# Altium PCB nrf52840_bma250e.PcbDoc
Units mil, origin at the board's own origin, x right, y up, seen from the top; angles counter-clockwise.
Board outline 4448.82 x 4448.82 mil, 2 copper layers (Top Layer, Bottom Layer), stack 12.8 mil thick; 33 components, 63 nets, 168 pads, 148 vias.
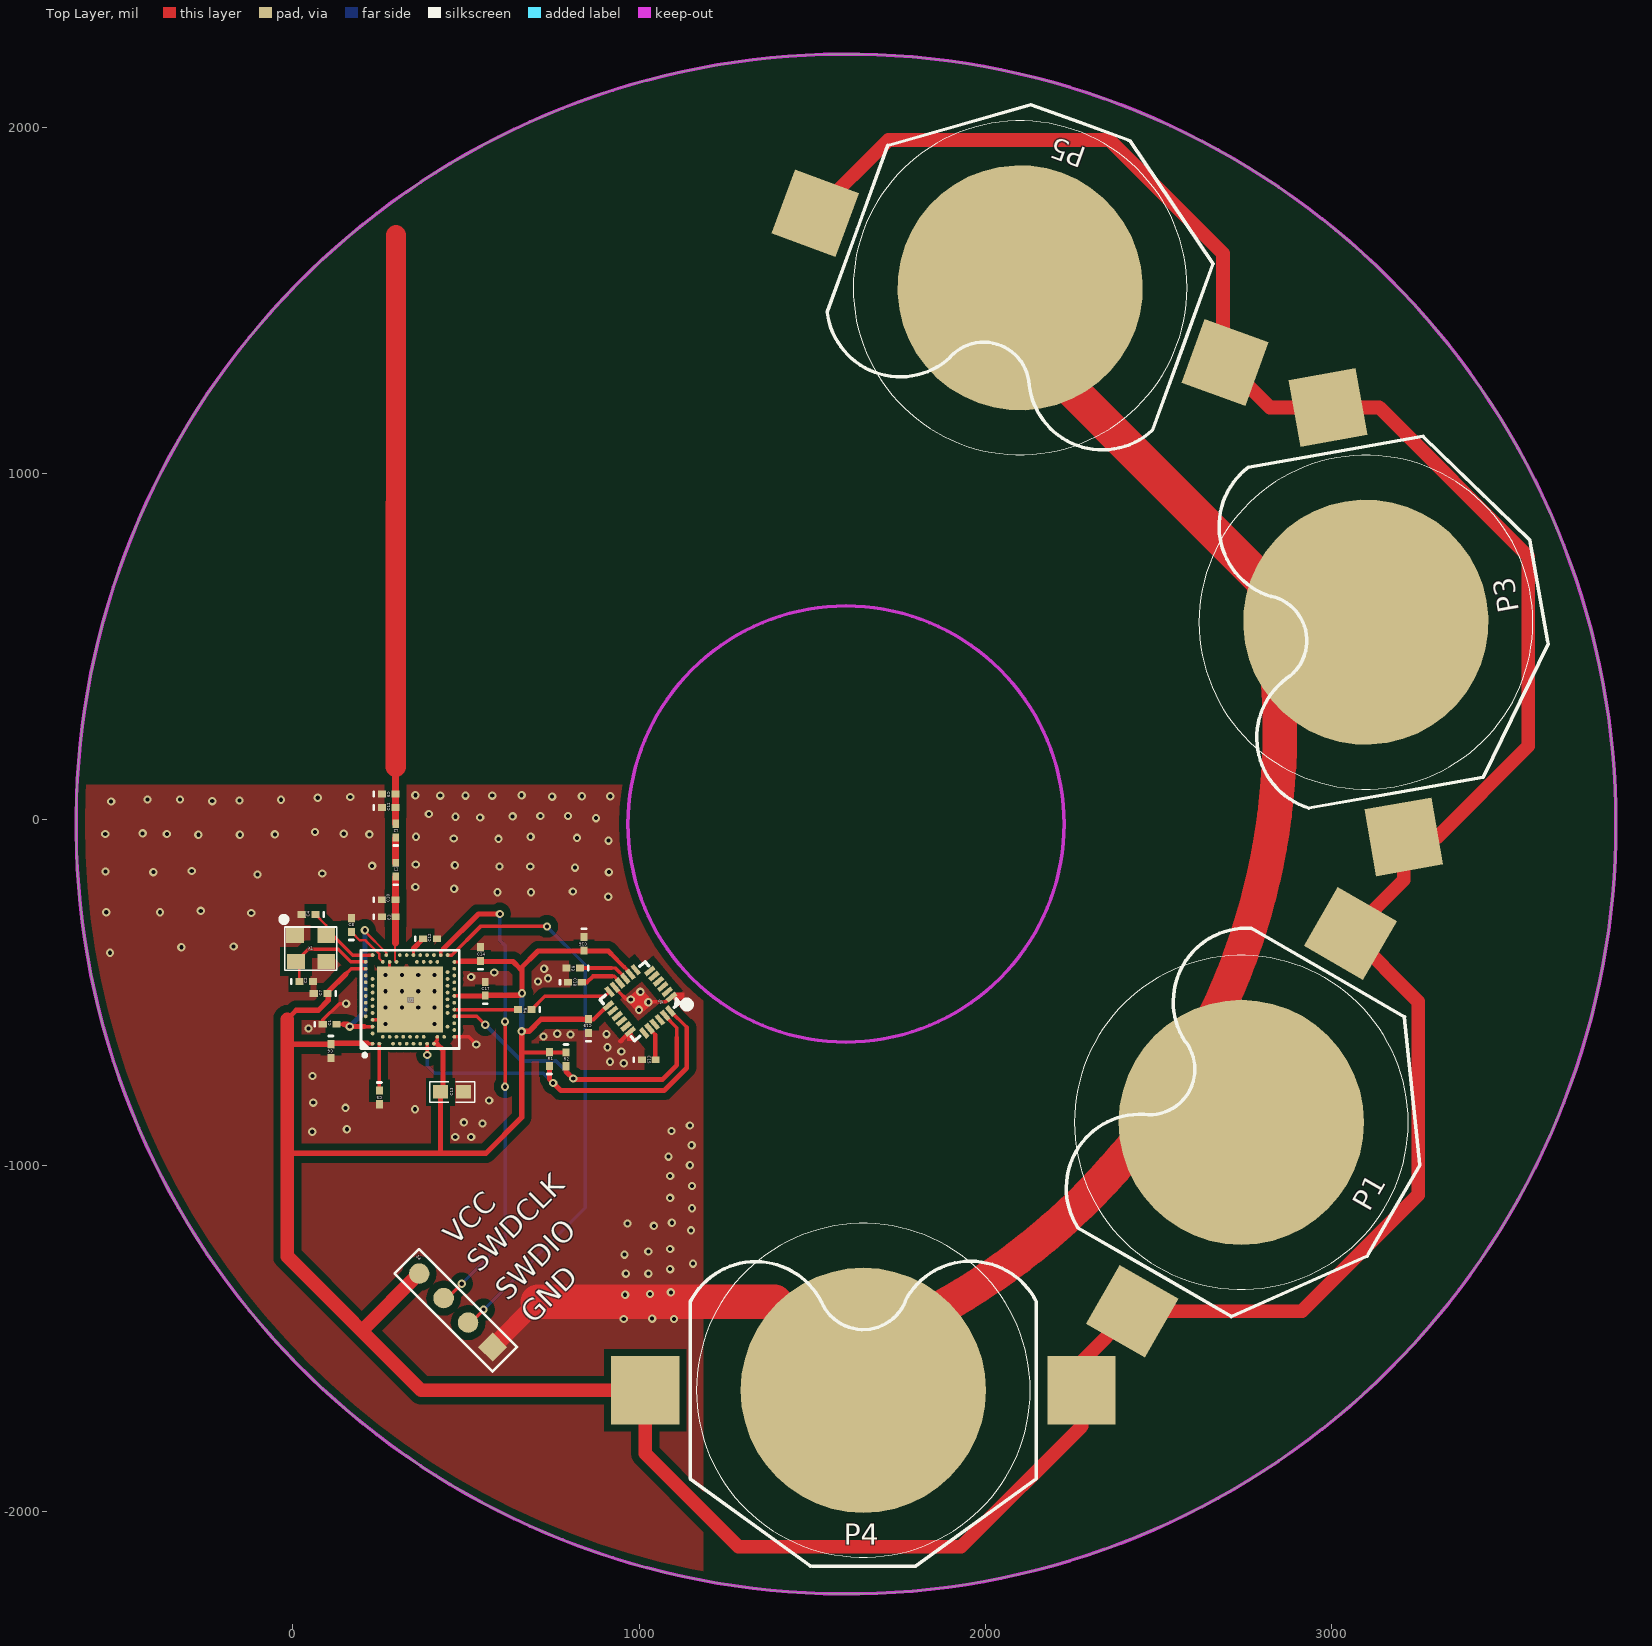
[diagram p0: Top Layer view]
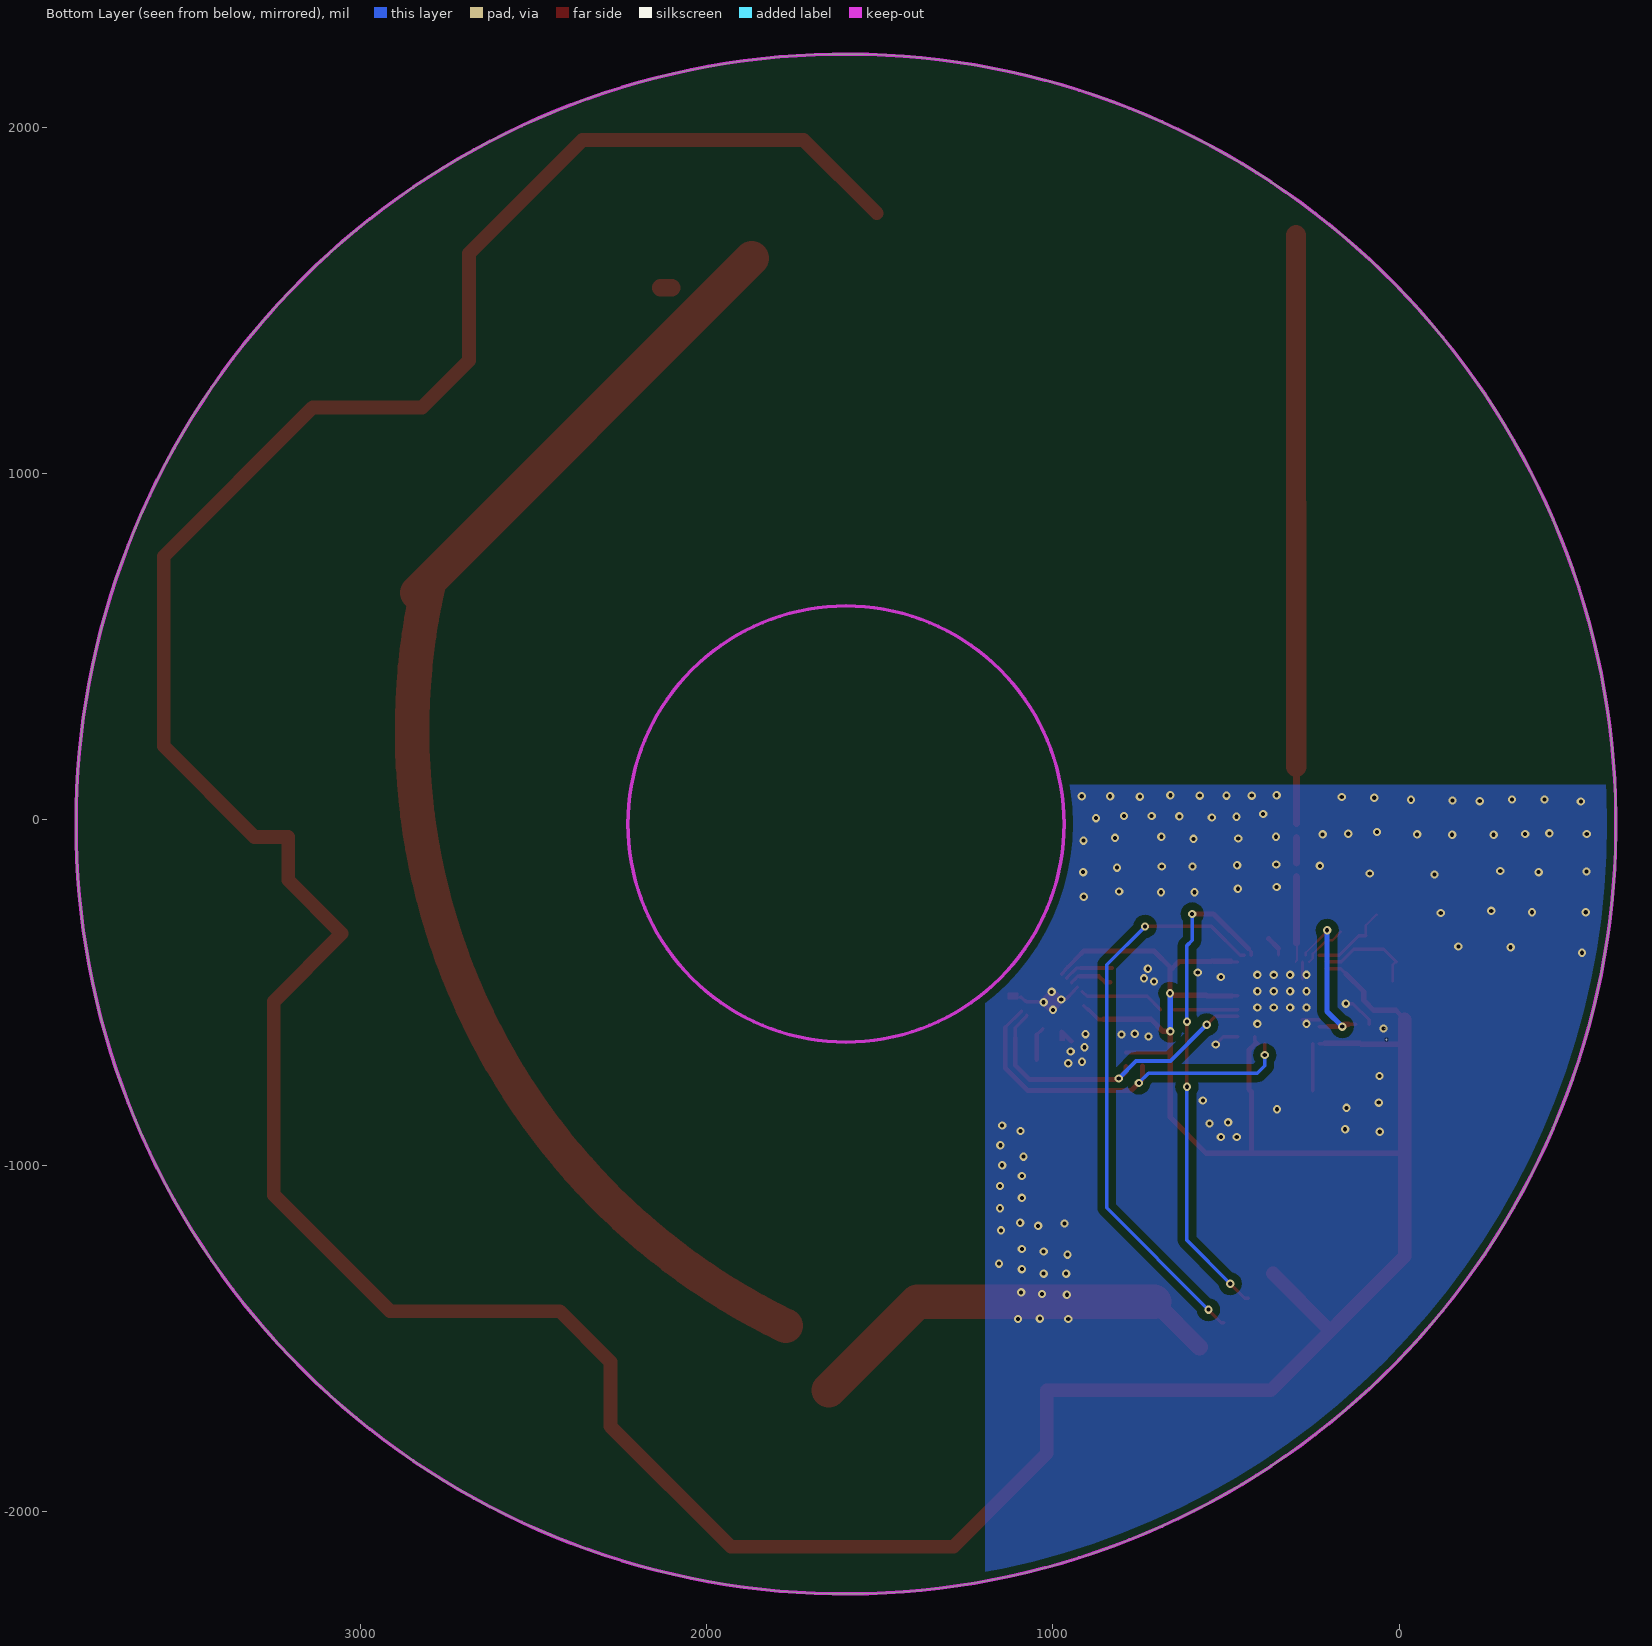
[diagram p1: Bottom Layer view, seen from below]

## Layer stack, top to bottom
Top Layer: signal copper 1.4
Dielectric: core 10, FR-4, Dk 4.2
Bottom Layer: signal copper 1.4

## Board outline
-626.41,-13 ccw(c1598,-13) 1598,-2237.41 ccw(c1598,-13) 3822.41,-13 ccw(c1598,-13) 1598,2211.41 ccw(c1598,-13)

## Design rules (kind name [scope] priority, off if disabled: settings)
Clearance [All] p1: gap=5
ComponentClearance [All] p1 off: gap=10 collisioncheckmode=3 verticalgap=10 showdistances=FALSE
Height [All] p1 off: minheight=0 maxheight=1000 prefheight=500
MinimumSolderMaskSliver [All] p1 off: minsoldermaskwidth=10
NetAntennae [All] p1 off: netantennaetolerance=0
PlaneConnect [All] p1: planeconnectstyle=Direct reliefexpansion=20 reliefentries=4 reliefconductorwidth=10 reliefairgap=10
PolygonConnect [All] p1: connectstyle=Direct reliefconductorwidth=10 reliefentries=4 polygonreliefangle="90 Angle"
RoutingVias [All] p1: holewidth=28 width=50 viastyle="Through Hole" minholewidth=28 minwidth=50 maxholewidth=28 maxwidth=50
SilkToSilkClearance [All] p1 off: silktosilkclearance=10
SilkscreenOverComponentPads SilkToSolderMaskClearance [IsPad] p1 off: minsilkscreentomaskgap=10
SolderMaskExpansion [All] p1: expansion=4
Width [All] p1: maxlimit=100 minlimit=1 preferedwidth=10 minimp=50.000000 maximp=50.000000 favimp=50.000000
21 further rules are at their usual default settings.

## Components (designator, comment, footprint, x,y, rotation, side; value= is the part's Value field where it differs from the comment)
C1 "1.0μF" 0402-A 106.31,-591.39 r0 top
C2 "12pF" 0402-A 38.62,-467.62 r0 top
C3 "NC" 0402-A 277,-281 r0 top
C4 "12pF" 0402-A 45.62,-274.62 r180 top
C5 "100nF" 0402-A 250,-803 r270 top
C6 "1.0μF" 0402-A 110,-669 r270 top
C7 "100nF" 0402-A 80.31,-502.39 r180 top
C8 "100pF" 0402-A 169,-305 r90 top
C9 "NC" 0402-A 277,74 r0 top
C10 "NC" 0402-A 277,-232 r0 top
C11 "NC" 0402-A 277,35 r0 top
C12 "820pF" 0402-A 396.62,-344.62 r0 top
C13 "4.7μF" 0603-1 460,-787 r0 top
C14 "100nF" 0402-a 542,-389 r90 top
C15 "2.2nf" 0402-A 1028,-694 r0 top
C16 "0.1uF" 0402-A 841,-359 r270 top
C17 "100nF" 0402-a 556,-489 r90 top
C18 "0.1uF" 0402-A 815,-470 r0 top
C19 "0.1uF" 0402-A 854,-597 r90 top
L1 "NC" 0402-A 297,-145 r90 top
L2 "NC" 0402-A 297,-32 r90 top
P1 "Header 2" bat 2740,-875 r240 top
P2 "Header 4" HDR1X4 577,-1524 r135 top
P3 "Header 2" bat 3100,570 r280 top
P4 "Header 2" bat 1648,-1649 r180 top
P5 "Header 2" bat 2101,1536 r340 top
R1 "4.7K" 0402-A 741,-692 r90 top
R2 "4.7K" 0402-A 789,-693 r270 top
R3 "4.7K" 0402-A 810,-429 r180 top
R4 "0R" 0402-A 670,-549 r180 top
U1 "nRF52840-QIAA" AQFN50P700X700X85_HS-74N 338.62,-519.62 r90 top
U2 "mpu6050" mpu6050 1094,-513 r220 top
X1 "32MHz" SMD3225 96.62,-335.62 r180 top

## Footprints (in the part's own frame and the unit in brackets; to place one, negate y for a bottom-side part, rotate by r counter-clockwise, add the part's x,y. Pads: shape width x height; smd on the part's side, far side on the other; paste and mask are expansions set on the pad)
0402-A [mm] "Chip Inductor; Body 1 x 0.5 mm (LxW typ"
  rect 0.6x0.5 smd: 1(-0.5,0) 2(0.5,0)
  silkscreen extent -1.1,-0.15 -1.1,0.15
0402-a [mm] "Chip Inductor; Body 1 x 0.5 mm (LxW typ)"
  rect 0.6x0.5 smd: 1(-0.5,0) 2(0.5,0)
  silkscreen extent -1.1,-0.15 -1.1,0.15
0603-1 [mm]
  rect 1.1x1 smd: 1(-0.85,0) 2(0.85,0)
  silkscreen extent -1.65,-0.76 1.65,0.76, body extent -1.14,-0.38 1.14,0.38, height 1
AQFN50P700X700X85_HS-74N [mm]
  rect 4.85x4.85 smd mask+0.05: 74(0,0)
  round 0.275 smd paste+0.012 mask+0.05: A8(-1.25,3.25) A10(-0.75,3.25) A12(-0.25,3.25) A14(0.25,3.25) A16(0.75,3.25) A18(1.25,3.25) A20(1.75,3.25) A22(2.25,3.25) A23(2.75,3.25) AA24(3.25,-2.25) AB2(-2.75,-2.5) AC5(-2,-2.75) AC9(-1,-2.75) AC11(-0.5,-2.75) AC13(0,-2.75) AC15(0.5,-2.75) AC17(1,-2.75) AC19(1.5,-2.75) AC21(2,-2.75) AC24(3.25,-2.75) AD2(-2.75,-3.25) AD4(-2.25,-3.25) AD6(-1.75,-3.25) AD8(-1.25,-3.25) AD10(-0.75,-3.25) AD12(-0.25,-3.25) AD14(0.25,-3.25) AD16(0.75,-3.25) AD18(1.25,-3.25) AD20(1.75,-3.25) AD22(2.25,-3.25) AD23(2.75,-3.25) B1(-3.25,2.75) B3(-2.5,2.75) B5(-2,2.75) B7(-1.5,2.75) B9(-1,2.75) B11(-0.5,2.75) B13(0,2.75) B15(0.5,2.75) B17(1,2.75) B19(1.5,2.75) B24(3.25,2.75) C1(-3.25,2.25) D2(-2.75,2) D23(2.75,2) E24(3.25,1.75) F2(-2.75,1.5) F23(2.75,1.5) G1(-3.25,1.25) H2(-2.75,1) H23(2.75,1) J1(-3.25,0.75) J24(3.25,0.75) K2(-2.75,0.5) L1(-3.25,0.25) L24(3.25,0.25) M2(-2.75,0) N1(-3.25,-0.25) N24(3.25,-0.25) P2(-2.75,-0.5) P23(2.75,-0.5) R1(-3.25,-0.75) R24(3.25,-0.75) T2(-2.75,-1) T23(2.75,-1) U1(-3.25,-1.25) U24(3.25,-1.25) V23(2.75,-1.5) W1(-3.25,-1.75) W24(3.25,-1.75) Y2(-2.75,-2) Y23(2.75,-2)
  silkscreen extent -4.21,-3.6 3.6,3.6, body extent -3.55,-3.55 3.55,3.55, height 0.85
bat [mm]
  round 18 smd: 1(0,0)
  rect 5x5 smd: 2(-16,0) 2(16,0)
  silkscreen extent -12.7,-12.25 12.7,12.9
HDR1X4 [mm] "Connector; Header; 4 Position"
  rect 1.5x1.5 smd: 1(0,0)
  round 1.5 smd: 2(2.54,0) 3(5.08,0) 4(7.62,0)
  silkscreen extent -1.27,-1.27 8.89,1.27
mpu6050 [mm]
  rect 0.85x0.35 smd: 1(0,0) 2(0,-0.5) 3(0,-1) 4(0,-1.5) 5(0,-2) 6(0,-2.5) 13(3.95,-2.5) 14(3.95,-2) 15(3.95,-1.5) 16(3.95,-1) 17(3.95,-0.5) 18(3.95,0)
  rect 0.35x0.85 smd: 7(0.725,-3.225) 8(1.225,-3.225) 9(1.725,-3.225) 10(2.225,-3.225) 11(2.725,-3.225) 12(3.225,-3.225) 19(3.225,0.725) 20(2.725,0.725) 21(2.225,0.725) 22(1.725,0.725) 23(1.225,0.725) 24(0.725,0.725)
  Top Layer region: 1.27,-2.029 2.667,-2.029 2.667,-0.505 1.27,-0.505
  silkscreen extent -0.63,-3.23 4.13,1.27
SMD3225 [mm]
  rect 1.3x1.1 smd: 1(0,0) 2(2.3,0) 3(2.23,1.9) 4(0,1.9)
  silkscreen extent -0.76,-1.32 3.24,2.54

## Part data
C1 C6: library part C0603-1?, "Capacitor, X7R, ±10%"
C2 C4: library part C0402-12p, "Capacitor, NP0, ±2%"
C3 C9 C10: library part C0402-0.8p, "Capacitor, NP0, ±10%"
C5 C7 C14 C17: library part C0402-100n, "Capacitor, X7R, ±10%"
C8: library part C0402-100p, "Capacitor, NP0, ±5%"
C11 C15 C16 C18 C19: library part C0402-0.5p, "Capacitor, NP0, ±10%"
C12: library part C0402-820p, "Capacitor, NP0, ±5%"
C13: library part C0603-4μ7-6.3V, "Capacitor, X7R, ±1"
L1 L2: library part L0402-4n7, "High frequency chip inductor ±5%"
P1 P3 P4 P5: "Header, 2-Pin"
P2: "Header, 4-Pin"
R1 R2 R3 R4: library part Res1, "Resistor"
U1: library part nRF52840-QIAAD0, "Multi-protocol Bluetooth Low Energy, IEEE 802.15.4, ANT and 2.4GHz proprietary system-on-chip"
X1: library part XTAL_SMD2016_32MHz_8pF_General, "XTAL SMD 2016, 32MHz, Cl=8pF, Total Tol: ±40ppm"

## Via types
v1: diameter 24, hole 12, Top Layer to Bottom Layer, 148 vias

## Nets (pads, with @x,y where several pads share a name; then routed paths per layer and width w, separated by ;. In a path a pad name is that pad's centre, name@x,y a point inside that pad or via, vN(x,y) a via of type N, cw(c..) or ccw(c..) an arc to the next point about the centre after c; other vN are vias at no path point)
DEC1: C5.1 U1.C1 | length 135.7
  Top Layer w10: C5.1@250.04,-783.28 U1.C1
DEC3: C8.1 U1.D23 | length 134.2
  Top Layer w7: C8.1 193.43,-349.12 210.31,-349.12 249.62,-388.43 249.62,-401.09 U1.D23
DEC4_6: C1.2 U1.B5 U1.E24 | length 520.8
  Top Layer w7: v1(208,-320) 208,-323.29 269.72,-385.02 U1.E24
  Top Layer w10: C1.2 147.31,-591.39 154.28,-598.36 v1(164.31,-598.36) ; 206.31,-598.36 U1.B5
  Top Layer w15: 147.31,-591.39 157.33,-591.39 v1(164.31,-598.36) 206.31,-598.36
  Bottom Layer w15: v1(164.31,-598.36) 208,-554.67 v1(208,-320)
GND: C1.1 C2.2 C3.1 C4.2 C5.2 C6.2 C7.2 C8.2 C9.1 C10.1 C11.1 C12.2 C13.2 C14.2 C15.1 C16.1 C17.2 C18.1 C19.1 P1.1 P2.1 P3.1 P4.1 P5.1 R3.2 U1.74 U1.AD2 U1.B7 U1.F23 U2.1 U2.11 U2.18 X1.2 X1.4 | length 5637.8
  Top Layer w5.71: U1.F23 U1.F23@279.57,-409.76
  Top Layer w9: U1.74@279.57,-460.57 U1.F23
  Top Layer w10: C1.1 86.62,-579.03 133.65,-532 v1(154,-532) ; U1.B7 U1.74@279.57,-578.68 ; U1.AD2 507.89,-627.89 v1(530,-650) ; U2.11 940.34,-494.84 940.34,-496.34 964,-520 v1(976,-520) ; 945,-641 946.83,-641 ; v1(1027,-528) 1029,-526 1077,-526 1079.05,-523.95 1081.22,-523.95 1092.18,-513 U2.1
  Top Layer w13: 946.83,-641 U2.18
  Top Layer w50: P2.1 708,-1393 ; P5.1 P5.1@2134,1536
  Top Layer w100: 708,-1393 1092,-1393 1392,-1393 P4.1 ; P4.1@1771.83,-1462.93 ccw(c941.83,257.07) P3.1@2806,671.98 ; P5.1@1870,1621 P3.1@2836,655
  other v1: 956,-1443 1101,-1443 1038,-1442 960,-1373 1032,-1371 1092,-1366 962,-1312 1027,-1312 1090,-1299 1156,-1283 958,-1257 1027,-1248 1090,-1241 1150,-1187 1043,-1174 967,-1167 1095,-1165 1153,-1123 1090,-1093 1153,-1059 1090,-1030 1147,-999 1085,-974 1152,-941 469,-917 515,-917 56,-902 1094,-900 156,-895 1147,-884 548,-878 494,-875 353,-837 152,-833 59,-818 567,-812 57,-741 956,-704 916,-700 949,-670 909,-658 724,-627 802,-621 906,-620 764,-619 45,-604 267.76,-590.49 409.49,-590.49 1000,-550 267.76,-543.24 315,-543.24 362.24,-543.24 409.49,-543.24 1004,-498 267.76,-496 315,-496 362.24,-496 409.49,-496 708,-468 737,-459 515,-455 267.76,-448.76 315,-448.76 362.24,-448.76 409.49,-448.76 582,-442 726,-431 -528,-385 -322,-369 -171,-367 -120,-270 -539,-268 -384,-268 -266,-264 911,-223 591,-210 688,-210 809,-208 466,-200 354,-195 -102,-159 85,-156 -403,-152 913,-152 -541,-150 -292,-149 815,-139 597,-136 686,-136 229,-134 468,-132 355,-130 912,-61 594,-56 465,-55 821,-53 356,-50 687,-50 -273,-44 -153,-44 -52,-43 221,-43 -542,-42 -364,-42 147,-41 -434,-40 64,-36 876,4 541,6 470,8 635,9 715,10 795,10 393,16 -525,52 -233,53 -154,55 -34,57 -420,58 -326,58 72,63 166,65 749,66 835,67 917,67 426,69 499,69 576,69 354,70 661,70
NetC3_2: C3.2 C10.2 L1.1 U1.H23 | length 246.5
  Top Layer w5.71: 295.12,-358.81 295.12,-407.22 U1.H23
  Top Layer w20: 296.69,-357.24 L1.1@296.69,-165
NetC12_1: C12.1 U1.N24 | length 58.8
  Top Layer w8: U1.N24 348.46,-373.09
  Top Layer w15: 348.46,-373.09 C12.1
NetC15_2: C15.2 U2.20 | length 97.4
  Top Layer w10: U2.20 1030.16,-605.16 1047,-622
  Top Layer w12: 1047,-622 1047,-693.31 C15.2
NetC18_2: C18.2 U2.10 | length 127.1
  Top Layer w10: 922,-453 929,-453 934.33,-458.33 934.33,-459.27 945.28,-470.22 U2.10
  Top Layer w12: C18.2 850,-470 867,-453 922,-453
NetL1_2: L1.2 L2.1 | length 73.6
  Top Layer w20: L1.2 L2.1
NetR3_1: R3.1 U2.9 | length 144.3
  Top Layer w10: 921,-429 931.79,-429 960.36,-457.57 U2.9
  Top Layer w12: R3.1 921,-429
NetR4_1: R4.1 U2.12 | length 246.8
  Top Layer w10: R4.1 727.69,-511 901.47,-511 U2.12
P0.02/AIN0: U1.A12
P0.03/AIN1: U1.B13
P0.04/AIN2: U1.J1
P0.05/AIN3: U1.K2
P0.06: U1.L1
P0.07: U1.M2
P0.08: U1.N1
P0.09/NFC1: U1.L24
P0.10/NFC2: U1.J24
P0.11: U1.T2
P0.12: R1.1 U1.U1 U2.24 | length 1108.6
  Top Layer w10: U1.U1 387.83,-679.91 v1(388.31,-680.39) ; U2.24 1138,-600.73
  Top Layer w14: R1.1 741,-750 774,-783 1073,-783 1138,-718 1138,-600.73
  Bottom Layer w10: v1(388.31,-680.39) 388.31,-711.31 410,-733 724,-733 v1(752,-761)
P0.13: R2.2 U1.AD8 U2.23 | length 937.5
  Top Layer w10: U1.AD8 531.83,-568.83 v1(556,-593) ; U2.23 1075.4,-567.69 1109,-601.29 1109,-629
  Top Layer w14: R2.2 789,-728 812,-751 1068,-751 1109,-710 1109,-629
  Bottom Layer w12: v1(556,-593) 661,-698 760,-698 v1(810,-748)
P0.14: U1.AC9
P0.15: R4.2 U1.AD10 | length 219.8
  Top Layer w10: 502.54,-549.15 U1.AD10 466.72,-549 R4.2
P0.16: U1.AC11
P0.17: U1.AD12
P0.18/RESET: U1.AC13
P0.19: U1.AC15
P0.20: U1.AD16
P0.21: U1.AC17
P0.22: U1.AD18
P0.23: U1.AC19
P0.24: U1.AD20
P0.25: U1.AC21
P0.26: U1.G1
P0.27: U1.H2
P0.28/AIN4: U1.B11
P0.29/AIN5: U1.A10
P0.30/AIN6: U1.B9
P0.31/AIN7: U1.A8
P1.00: U1.AD22
P1.01: U1.Y23
P1.02: U1.W24
P1.03: U1.V23
P1.04: U1.U24
P1.05: U1.T23
P1.06: U1.R24
P1.07: U1.P23
P1.08: U1.P2
P1.09: U1.R1
P1.10: U1.A20
P1.11: U1.B19
P1.12: U1.B17
P1.13: U1.A16
P1.14: U1.B15
P1.15: U1.A14
RF: C9.2 C11.2 L2.2 | length 1699.1
  Top Layer w20: C9.2 296.69,151.69 ; L2.2 C9.2@297,73.69
  Top Layer w59.06: 297,152 298,1687.43
SWDCLK: P2.3 U1.AA24 | length 1421.3
  Top Layer w10: U1.AA24 427.2,-382.04 436.31,-372.94 ; P2.3 446.42,-1382.58 v1(488,-1341) ; v1(613,-772) v1(613,-584)
  Top Layer w15: 436.18,-372.81 535.98,-273 v1(598,-273)
  Bottom Layer w10: v1(488,-1341) 613,-1216 v1(613,-772) ; v1(598,-273) 598,-349 613,-364 v1(613,-584)
SWDIO: P2.2 U1.AC24 | length 1656.3
  Top Layer w10: U1.AC24 459.33,-391.67 542,-309 v1(734,-309) ; P2.2 513.71,-1453.29 v1(551,-1416)
  Bottom Layer w10: v1(551,-1416) 845,-1122 845,-420 v1(734,-309)
VDD_NRF: C6.1 C7.1 C13.1 C14.1 C16.2 C17.1 C19.2 P1.2 P2.4 P3.2 P4.2 P5.2 R1.2 R2.1 U1.A22 U1.AD14 U1.AD23 U1.B1 U1.W1 U1.Y2 U2.8 U2.13 | length 13412.7
  Top Layer w8: U1.AD23 486.35,-411.35
  Top Layer w10: 153.31,-446.39 168.65,-431.04 U1.A22 ; 215.09,-646.62 216.04,-647.57 U1.B1 ; U1.W1 417.36,-637.73 U1.Y2 ; U1.AD14 482.62,-509.78 ; 897,-549 900.17,-549 U2.13 ; 958.49,-427 964.49,-433 964.49,-435.78 U2.8
  Top Layer w12: 661,-673 661.32,-673.31 R2.1 ; C19.2 868.69,-577.31 897,-549 ; 918.49,-387 958.49,-427
  Top Layer w15: -16,-959 -11,-964 426,-964 ; -16,-577 10,-551 74,-551 101.99,-523.01 101.99,-497.7 153.31,-446.39 ; -10.31,-649.31 C6.1 ; C6.1@113.23,-646.62 215.09,-646.62 ; 415.62,-647.62 433.62,-665.62 433.62,-779.91 C13.1 426.54,-963.46 426,-964 ; 482.62,-509.78 554.91,-509.78 C17.1 556.69,-508 656,-508 v1(662,-502) 662,-436 ; 486.35,-409.62 C14.1@536.16,-409.62 ; C14.1 543.32,-410 636,-410 657,-431 ; 662,-426 662,-436 ; C19.2 716.69,-577.31 682,-612 v1(661,-612) 661,-673 661,-861 558,-964 426,-964 ; 918.49,-387 911.17,-379.69 815,-379.69 708.31,-379.69 657,-431 ; 657,-431 662,-436
  Top Layer w40: -16,-577 -16,-959 -16,-1262 371,-1649 1018.08,-1649 1018.08,-1832.08 1287,-2101 1930,-2101 2277.92,-1753.08 2277.92,-1649 2277.92,-1567.65 2425.04,-1420.53 2915.47,-1420.53 3251,-1085 3251,-525.51 3054.96,-329.47 3209.38,-175.05 3209.38,-50.35 3306.65,-50.35 3569,212 3569,760 3138.65,1190.35 2990.62,1190.35 2823.14,1190.35 2692.93,1320.55 2687,1326.49 2687,1635 2359,1963 1720.62,1963 P5.2@1509.07,1751.45 ; 202.74,-1474 P2.4
  Bottom Layer w15: v1(661,-612) v1@661,-503
XC1: C4.1 U1.B24 X1.1 | length 230.9
  Top Layer w7: C4.1 96.62,-305.94 X1.1
  Top Layer w10: X1.1 116.62,-335.62 172.67,-391.67 U1.B24
XC2: C2.1 U1.A23 X1.3 | length 293.3
  Top Layer w7: X1.3 18.94,-420.54 C2.1
  Top Layer w10: X1.3 44.63,-374.62 130.62,-374.62 167.35,-411.35 U1.A23
pads on no net: U1.A18 U1.AB2 U1.AC5 U1.AD4 U1.AD6 U1.B3 U1.D2 U1.F2 U2.2 U2.3 U2.4 U2.5 U2.6 U2.7 U2.14 U2.15 U2.16 U2.17 U2.19 U2.21 U2.22

## Polygon pours and split planes (outlines as drawn)
GND on Top Layer "Bottom Layer-No Net 1" (solid, remove dead copper, pour order 6): 221,101 222,100 1186,100 1186,-2809 1129,-2866 1050,-2787 -549,-2787 -549,-888 -838,-599 -887,-550 -887,101
GND on Bottom Layer "Bottom Layer-No Net 1" (solid, remove dead copper, pour order 8): -887,101 1181,101 1184,98 1195,87 1195,-2868 -986,-2868 -1020,-2902

## Keep-outs
Keep-Out Layer:
  circle w10: c1598,-13 r2224.41
  circle w10: c1598,-13 r629.92

## Other copper
Top Layer:
  rectangle net GND: 1100,-519.71 1132,-500
  rectangle net GND: 966,-640 981,-615

## Silkscreen, mask and mechanical layers (free items; w line width, h text height)
Top Overlay:
  text "VCC" at 471,-1233 h60 r45
  text "SWDCLK" at 538,-1311 h60 r45
  text "SWDIO" at 621,-1393 h60 r45
  text "GND" at 695,-1460 h60 r45
Bottom Overlay:
  text "-" at 38.31,-607.39 h8
  text "+" at 33.31,-632.39 h8 r270
Top Solder:
  lines w59.06: 297,155 298,1690.43